# Altium PCB PCB2.PcbDoc (part 1 of 4)
Units mm, origin at the board's own origin, x right, y up, seen from the top; angles counter-clockwise.
Board outline 247 x 102 mm, 2 copper layers (Top Layer, Bottom Layer); 199 components, 195 nets, 863 pads, 110 vias.
Unrouted connection lines stored in the file: 60.
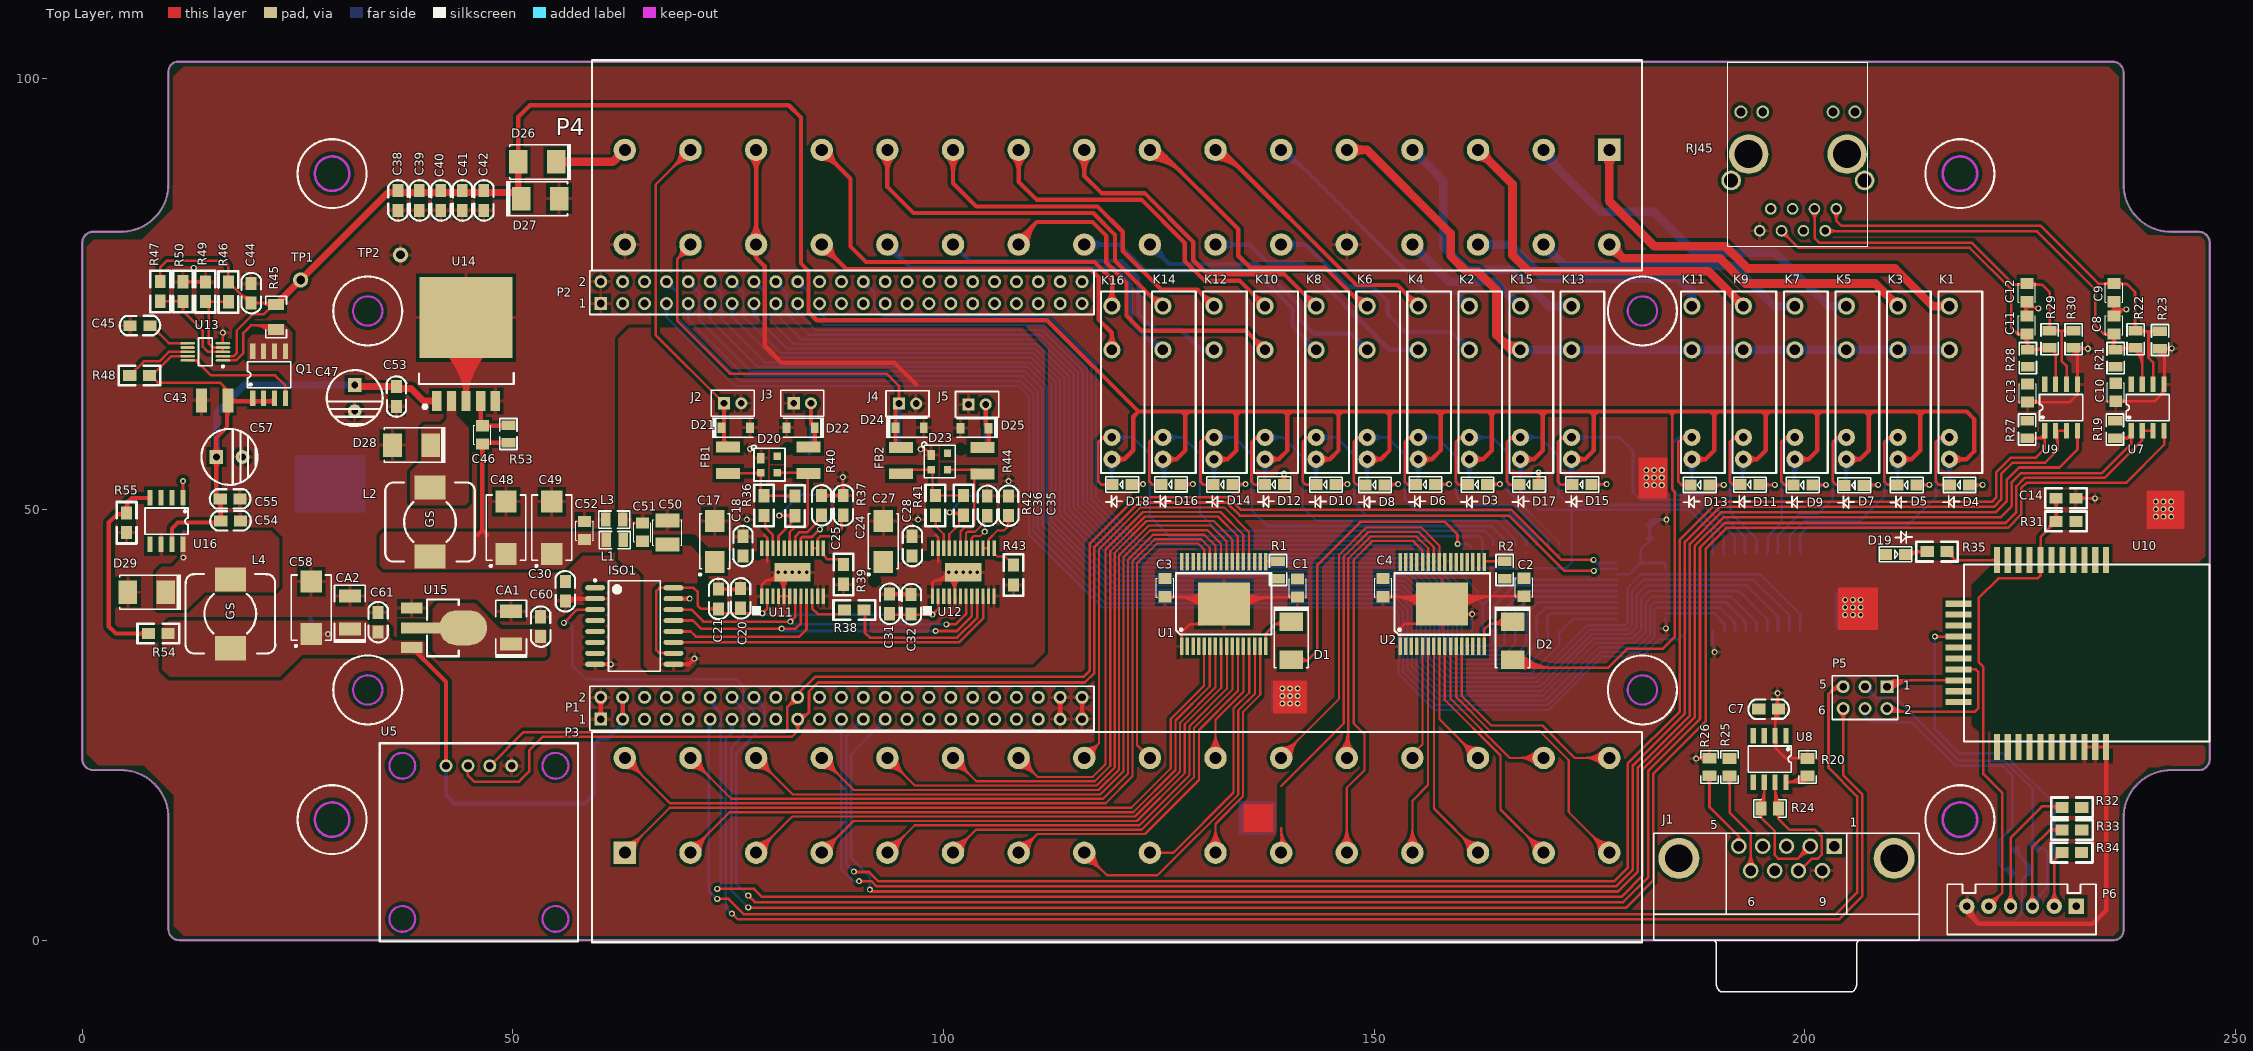
[diagram p0: Top Layer view]
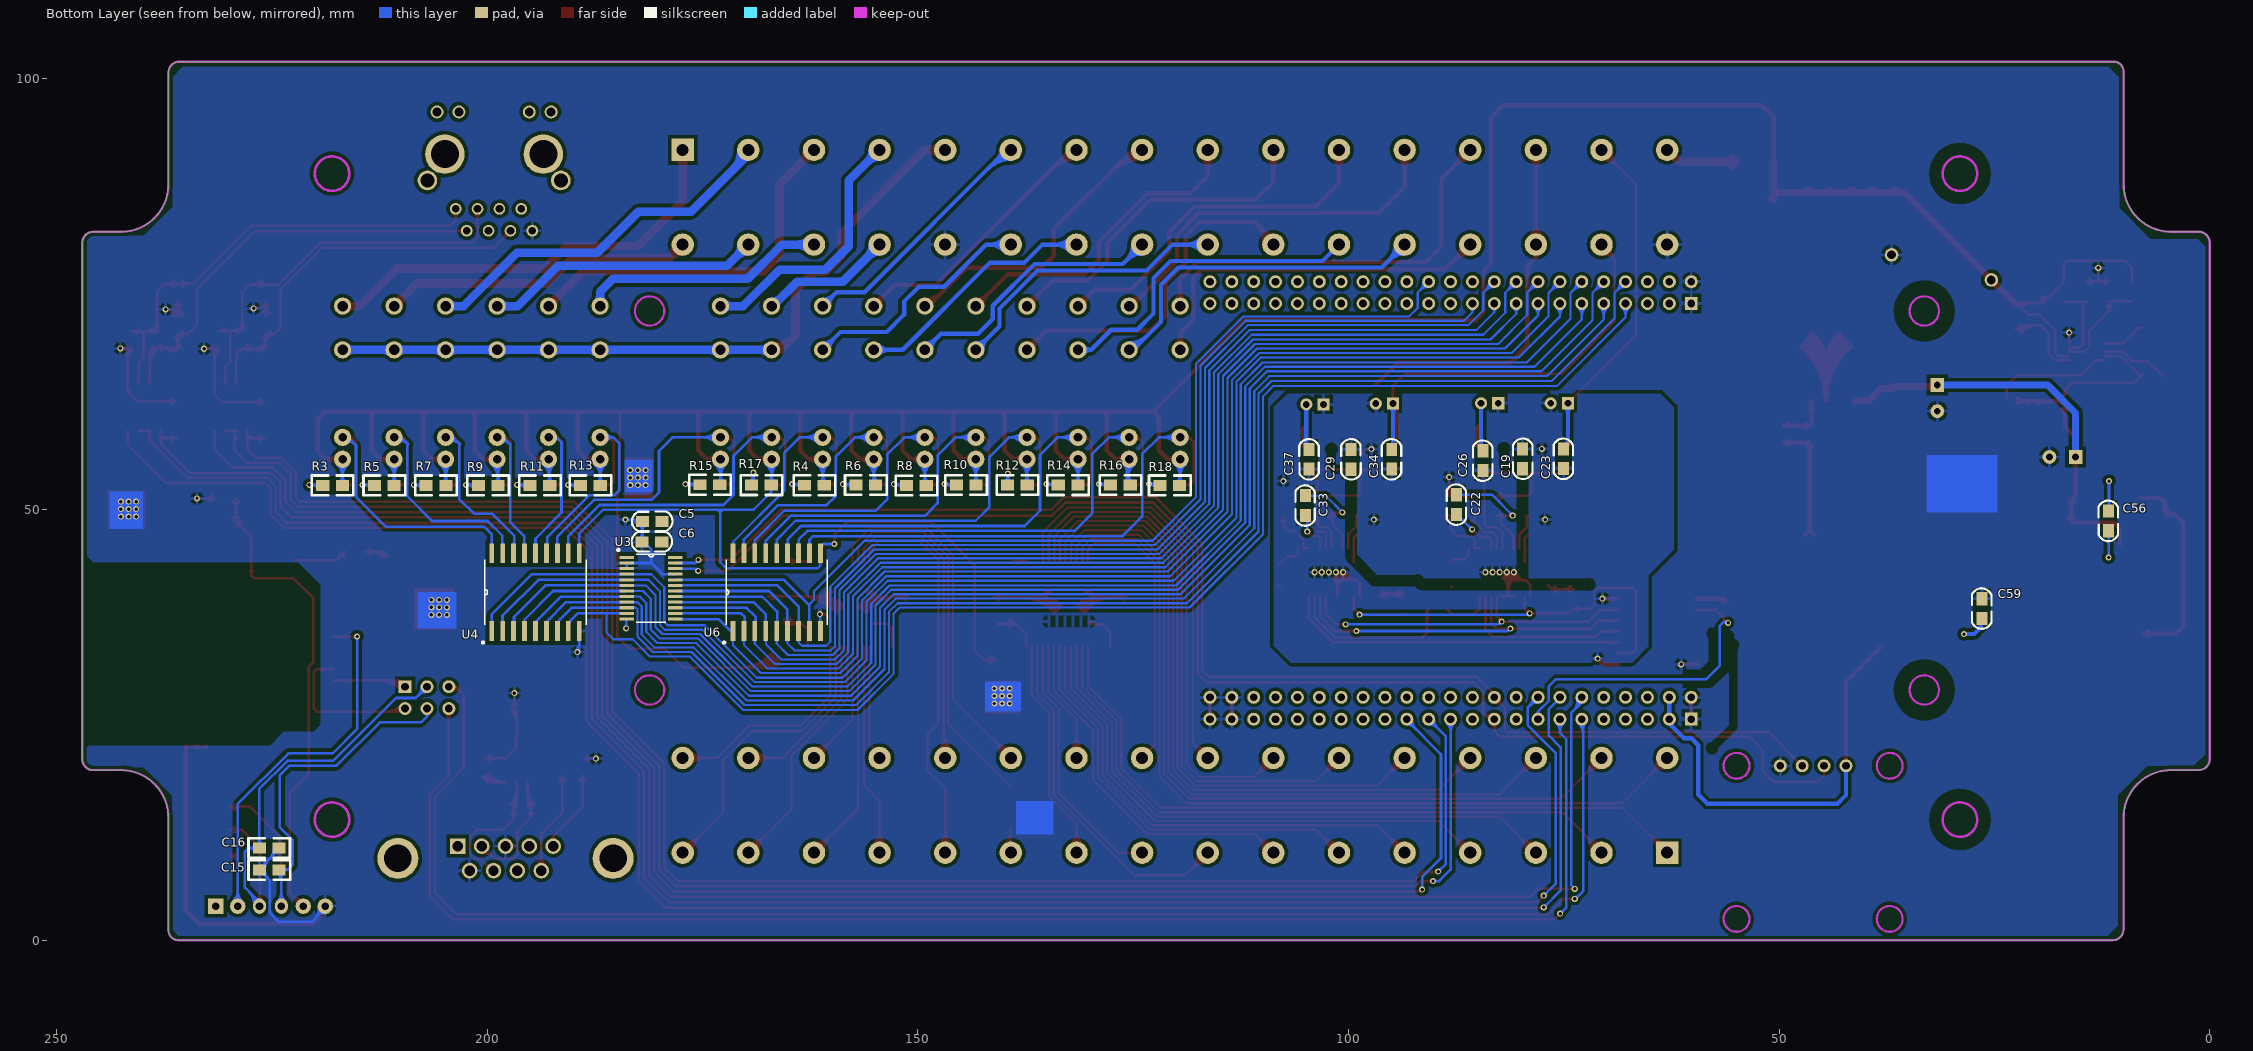
[diagram p1: Bottom Layer view, seen from below]

## Layer stack, top to bottom
Top Layer: signal copper 0.0356
Dielectric: dielectric 0.32, FR-4, Dk 4.8
Bottom Layer: signal copper 0.0356

## Board outline
1.27,19.75 4.5,19.75 cw(c4.5,14.25) 10,14.25 10,1.27 ccw(c11.27,1.27) 11.27,0 235.857,0 ccw(c235.857,1.143) 237,1.143 237,14.243 cw(c242.5,14.243) 242.5,19.743 245.73,19.743 ccw(c245.73,21.013) 247,21.013 247,80.98 ccw(c245.73,80.98) 245.73,82.25 242.5,82.25 cw(c242.5,87.75) 237,87.75 237,100.73 ccw(c235.73,100.73) 235.73,102 11.143,102 ccw(c11.143,100.857) 10,100.857 10,87.757 cw(c4.5,87.757) 4.5,82.257 1.27,82.257 ccw(c1.27,80.987) 0,80.987 0,21.02 ccw(c1.27,21.02)

## Design rules (kind name [scope] priority, off if disabled: settings)
Clearance [All] p1: gap=0.4
ComponentClearance [All] p1: gap=0.254 collisioncheckmode=3 verticalgap=0.254
PolygonConnect [All] p1: connectstyle=Relief reliefconductorwidth=0.4 reliefentries=4 polygonreliefangle="90 Angle"
RoutingVias [All] p1: holewidth=0.711 width=1.27 viastyle="Through Hole" minholewidth=0.711 minwidth=1.27 maxholewidth=0.711 maxwidth=1.27
SolderMaskExpansion [All] p1: expansion=0.102
TestPointUsage [All] p1: valid=0 allowmultiple=FALSE
Testpoint [All] p1: side=15 testpointundercomponent=TRUE minsize=1.016 maxsize=2.54 preferedsize=1.524 minholesize=0 maxholesize=1.016 preferedholesize=0.813 testpointgrid=0.025 style=1023 order=0123456789
Width [All] p1: maxlimit=2 minlimit=0.254 preferedwidth=0.254 toplayer_prefwidth=0.3 bottomlayer_prefwidth=0.3 minimp=50.000000 maximp=50.000000 favimp=50.000000
18 further rules are at their usual default settings.

## Classes and differential pairs
net class PA[0..7]: PA0 PA1 PA2 PA3 PA4 PA5 PA6 PA7
net class PB[0..7]: PB0 PB1 PB2 PB3 PB4 PB5 PB6 PB7
component class Designator7: C38 C39 C40 C41 C42 C43 C44 C45 C46 C47 C48 C49 C50 C51 C52 C53 C54 C55 C56 C57 C58 C59 C60 C61 CA1 CA2 D26 D27 D28 D29 L1 L2 L3 L4 Q1 R45 R46 R47 R48 R49 R50 R51 R52 R53 R54 R55 TP1 TP2 U13 U14 U15 U16
component class Designator1: P1 P2 P3 P4
component class Designator2: C1 C2 C3 C4 D1 D2 R1 R2 U1 U2
component class Designator4: C5 C6 D3 D4 D5 D6 D7 D8 D9 D10 D11 D12 D13 D14 D15 D16 D17 D18 K1 K2 K3 K4 K5 K6 K7 K8 K9 K10 K11 K12 K13 K14 K15 K16 R3 R4 R5 R6 R7 R8 R9 R10 R11 R12 R13 R14 R15 R16 R17 R18 U3 U4 U5 U6
component class Designator5: C7 C8 C9 C10 C11 C12 C13 C14 C15 C16 D19 J1 P5 P6 R19 R20 R21 R22 R23 R24 R25 R26 R27 R28 R29 R30 R31 R32 R33 R34 R35 RJ45 U7 U8 U9 U10
component class Designator6: C17 C18 C19 C20 C21 C22 C23 C24 C25 C26 C27 C28 C29 C30 C31 C32 C33 C34 C35 C36 C37 D20 D21 D22 D23 D24 D25 FB1 FB2 ISO1 J2 J3 J4 J5 R36 R37 R38 R39 R40 R41 R42 R43 R44 U11 U12

## Components (designator, comment, footprint, x,y, rotation, side; value= is the part's Value field where it differs from the comment)
C1 "Cap" C-0805 142.01,39.19 r90 top
C2 "0.1uF/10%/0805/50VDC" C-0805 168.28,39.28 r90 top
C3 "Cap" C-0805 126.6,39.23 r90 top
C4 "0.1uF/10%/0805/50VDC" C-0805 151.94,39.23 r90 top
C5 "Cap" 0805_cap 179.99,48.5 r0 bottom
C6 "Cap" 0805_cap 180.03,46.13 r0 bottom
C7 "" 0805_cap 194.95,26.95 r0 top
C8 "0.1uF/10%/0805/50VDC" C-0805 235,73.12 r270 top
C9 "0.1uF/10%/0805/50VDC" C-0805 236.8,73.48 r90 top
C10 "0.1uF/10%/0805/50VDC" C-0805 235.19,65.32 r270 top
C11 "0.1uF/10%/0805/50VDC" C-0805 224.87,73.12 r270 top
C12 "0.1uF/10%/0805/50VDC" C-0805 226.67,73.48 r90 top
C13 "0.1uF/10%/0805/50VDC" C-0805 224.96,65.22 r270 top
C14 "0.1uF" C0805 228.92,51.31 r180 top
C15 "101" C0805 223.89,8.17 r180 bottom
C16 "101" C0805 226.69,10.7 r0 bottom
C17 "293D475X9035C2TE3" 6032-28 73.43,46.3 r90 top
C18 "GRM188R71H104KA93D" 0805_cap 76.58,44.92 r90 top
C19 "GRM188R71H104KA93D" 0805_cap 79.883,55.05 r90 bottom
C20 "GRM188R71H104KA93D" 0805_cap 76.31,38.85 r90 top
C21 "GRM188R71H104KA93D" 0805_cap 73.75,38.78 r90 top
C22 "GRM1885C1H222JA01D" 0805_cap 87.33,51.41 r270 bottom
C23 "06035C104KAT2A" 0805_cap 74.91,56.73 r270 bottom
C24 "06035C104KAT2A" 0805_cap 88.24,49.65 r90 top
C25 "C1608X7R1H223K" 0805_cap 85.7,49.65 r90 top
C26 "06035C104KAT2A" 0805_cap 84.27,56.51 r270 bottom
C27 "293D475X9035C2TE3" 6032-28 93,46.3 r90 top
C28 "GRM188R71H104KA93D" 0805_cap 96.24,44.92 r90 top
C29 "GRM188R71H104KA93D" 0805_cap 99.833,54.99 r90 bottom
C30 "GRM188R71H104KA93D" 0805_cap 56.21,41.35 r270 top
C31 "GRM188R71H104KA93D" 0805_cap 93.61,38.21 r90 top
C32 "GRM188R71H104KA93D" 0805_cap 96.13,38.17 r90 top
C33 "GRM1885C1H222JA01D" 0805_cap 104.89,51.3 r270 bottom
C34 "06035C104KAT2A" 0805_cap 94.86,56.67 r270 bottom
C35 "06035C104KAT2A" 0805_cap 107.42,49.61 r90 top
C36 "C1608X7R1H223K" 0805_cap 104.96,49.59 r90 top
C37 "06035C104KAT2A" 0805_cap 104.44,56.67 r270 bottom
C38 "Cap" 0805_cap 36.52,85.05 r90 top
C39 "Cap" 0805_cap 39.015,85.05 r90 top
C40 "Cap" 0805_cap 41.51,85.05 r90 top
C41 "Cap" 0805_cap 44.005,85.05 r90 top
C42 "Cap" 0805_cap 46.5,85.05 r90 top
C43 "GRM32ER72A225KA35L" 1210 15.37,62.67 r0 top
C44 "06031C102JAT2A" 0805_cap 19.49,74.29 r90 top
C45 "UMK107ABJ474KA-T" 0805_cap 7.53,71.23 r180 top
C46 "0.1uF/50V" C-0805 45.55,60.37 r270 top
C47 "220μF" CZ3.0/6.5 31.63,62.94 r90 top
C48 "476C" 7343-43 49.21,47.89 r90 top
C49 "476C" 7343-43 54.501,47.89 r90 top
C50 "10uF/10%/1210/16VDC" C-1210 66.23,49.54 r270 top
C51 "0.1uF/10%/0805/50VDC" C-0805 64.12,49.08 r270 top
C52 "0.1UF" C-0805 57.4,49.26 r270 top
C53 "0.1uF" 0805_CAP 36.61,63.96 r270 top
C54 "4.7μF/10%/0805" 0805_CAP 18.05,48.56 r180 top
C55 "4.7μF/10%/0805" 0805_CAP 18,51.1 r180 top
C56 "0.01μF/10%/0805" 0805_CAP 11.64,49.52 r270 bottom
C57 "220μF" CZ3.0/6.5 17.09,56.11 r180 top
C58 "476C" 7343-43 26.58,38.6 r90 top
C59 "0.1μf/10%/0805" 0805_CAP 26.34,39.34 r270 bottom
C60 "0.1uF" 0805_CAP 53.09,35.57 r90 top
C61 "0.1uF" 0805_CAP 34.21,36.09 r90 top
CA1 "4.7UF/16V" 3528cap 49.82,34.4 r90 top
CA2 "10UF/16V" 3528cap 31.1,36.16 r90 top
D1 "SMB" SMB 140.37,34.78 r270 top
D2 "SMB" SMB 166.07,34.78 r270 top
D3 "LED3" 0805LED 161.95,52.9 r180 top
D4 "LED3" 0805LED 217.92,52.88 r180 top
D5 "LED3" 0805LED 211.79,52.86 r180 top
D6 "LED3" 0805LED 155.92,52.92 r180 top
D7 "LED3" 0805LED 205.69,52.83 r180 top
D8 "LED3" 0805LED 150.05,52.88 r180 top
D9 "LED3" 0805LED 199.72,52.85 r180 top
D10 "LED3" 0805LED 144.36,52.9 r180 top
D11 "LED3" 0805LED 193.59,52.9 r180 top
D12 "LED3" 0805LED 138.36,52.92 r180 top
D13 "LED3" 0805LED 187.76,52.88 r180 top
D14 "LED3" 0805LED 132.41,52.92 r180 top
D15 "LED3" 0805LED 174.1,52.92 r180 top
D16 "LED3" 0805LED 126.36,52.94 r180 top
D17 "LED3" 0805LED 167.94,52.92 r180 top
D18 "LED3" 0805LED 120.7,52.92 r180 top
D19 "VDD33" 0805LED 210.55,44.79 r0 top
D20 "" SOT-143 78.78,56.17 r0 top
D21 "CDSOD323-T15SC" SOD-123 75.87,59.5 r0 top
D22 "CDSOD323-T15SC" sod-123 83.4,59.5 r180 top
D23 "" SOT-143 98.56,56.53 r0 top
D24 "" sod-123 96.06,59.5 r0 top
D25 "" sod-123 103.59,59.45 r180 top
D26 "B540C-13-F" SMB 52.823,90.36 r180 top
D27 "SMCJ26CA" SMB 53.16,86.09 r0 top
D28 "D Schottky" SMB 38.23,57.48 r180 top
D29 "SMB" SMB 7.5,40.4 r180 top
FB1 "MH3261-501Y" 1210 74.98,55.73 r270 top
FB2 "MH3261-501Y" 1210 95.05,55.68 r270 top
ISO1 "ISO7641FCDW" M16B_N 64.09,36.48 r0 top
J1 "" CONN_1734348-1 197.866,0 r180 top
J2 "VOUT" PIN-S-2.0-1*2 74.51,62.34 r0 top
J3 "IOUT" PIN-S-2.0-1*2 82.6,62.34 r0 top
J4 "VOUT" PIN-S-2.0-1*2 94.82,62.29 r0 top
J5 "IOUT" PIN-S-2.0-1*2 102.89,62.21 r0 top
K1 "Relay-SPST" PA1a-24v 215.504,54.232 r90 top
K2 "Relay-SPST" PA1a-24v 159.769,54.232 r90 top
K3 "Relay-SPST" PA1a-24v 209.525,54.232 r90 top
K4 "Relay-SPST" PA1a-24v 153.84,54.232 r90 top
K5 "Relay-SPST" PA1a-24v 203.546,54.232 r90 top
K6 "Relay-SPST" PA1a-24v 147.91,54.232 r90 top
K7 "Relay-SPST" PA1a-24v 197.567,54.232 r90 top
K8 "Relay-SPST" PA1a-24v 141.981,54.232 r90 top
K9 "Relay-SPST" PA1a-24v 191.589,54.232 r90 top
K10 "Relay-SPST" PA1a-24v 136.051,54.232 r90 top
K11 "Relay-SPST" PA1a-24v 185.61,54.232 r90 top
K12 "Relay-SPST" PA1a-24v 130.122,54.232 r90 top
K13 "Relay-SPST" PA1a-24v 171.628,54.232 r90 top
K14 "Relay-SPST" PA1a-24v 124.192,54.232 r90 top
K15 "Relay-SPST" PA1a-24v 165.699,54.232 r90 top
K16 "Relay-SPST" PA1a-24v 118.263,54.232 r90 top
L1 "0R/5%/0805/1/8W" R-0805 60.31,45.56 r0 top
L2 "GSRH129-470M" GSDS104C2 40.37,48.55 r0 top
L3 "0R/5%/0805/1/8W" R-0805 60.27,47.93 r0 top
L4 "15μH" GSDS104C2 17.19,37.9 r0 top
P1 "Header 23X2" HDR2X23 60.198,25.658 r0 top locked
P2 "Header 23X2" HDR2X23 60.198,73.914 r0 top locked
P3 "Header 16X2" CON16X2-8.5 62.992,10.16 r90 top locked
P4 "Header 16X2" CON16X2-8.5 177.292,91.76 r270 top locked
P5 "Header 3X2" HDR2X3 209.52,29.43 r180 top
P6 "ISP" SIP-6B 231.5,3.95 r180 top
Q1 "FDS8870" SO-G8 21.7,65.65 r0 top
R1 "10K/1%/0805/1/8W" R-0805 139.74,41.48 r90 top
R2 "10K/1%/0805/1/8W" R-0805 166.05,41.48 r90 top
R3 "Res3" 0805 216.8,52.81 r0 bottom
R4 "Res3" 0805 160.86,52.82 r0 bottom
R5 "Res3" 0805 210.79,52.81 r0 bottom
R6 "Res3" 0805 154.89,52.86 r0 bottom
R7 "Res3" 0805 204.79,52.81 r0 bottom
R8 "Res3" 0805 151.3,52.79 r180 bottom
R9 "Res3" 0805 198.73,52.81 r0 bottom
R10 "Res3" 0805 145.52,52.84 r180 bottom
R11 "Res3" 0805 192.73,52.81 r0 bottom
R12 "Res3" 0805 139.58,52.84 r180 bottom
R13 "Res3" 0805 186.86,52.81 r0 bottom
R14 "Res3" 0805 133.69,52.83 r180 bottom
R15 "Res3" 0805 172.99,52.88 r0 bottom
R16 "Res3" 0805 127.61,52.84 r180 bottom
R17 "Res3" 0805 167.01,52.83 r0 bottom
R18 "Res3" 0805 121.88,52.81 r180 bottom
R19 "10K/1%/0805/1/8W" R-0805 236.89,57.8 r90 top
R20 "CRCW080560R4FKEA" 0805_HV 200.3,20.1 r90 top
R21 "47K/5%/0805/1/8W" R-0805 235.17,69.08 r270 top
R22 "12K/1%/0805/1/8W" R-0805 237.49,71.28 r270 top
R23 "47K/5%/0805/1/8W" R-0805 240.34,71.18 r270 top
R24 "CRCW080560R4FKEA" 0805_HV 195.93,15.28 r180 top
R25 "CRCW080560R4FKEA" 0805_HV 191.26,20.1 r90 top
R26 "CRCW080560R4FKEA" 0805_HV 188.91,20.11 r270 top
R27 "10K/1%/0805/1/8W" R-0805 226.71,57.8 r90 top
R28 "47K/5%/0805/1/8W" R-0805 224.98,69.08 r270 top
R29 "12K/1%/0805/1/8W" R-0805 227.51,71.28 r270 top
R30 "47K/5%/0805/1/8W" R-0805 230.3,71.28 r270 top
R31 "Res2" 0805 229.17,48.63 r0 top
R32 "3.3k" R0805 229.61,15.43 r180 top
R33 "3.3k" R0805 229.61,12.81 r180 top
R34 "Res2" R0805 232.38,10.17 r0 top
R35 "620Ω" R0805 213.95,45.11 r180 top
R36 "CRCW060315R0JNEA" 0805 79.15,49.31 r90 top
R37 "CRCW060315R0JNEA" 0805 82.75,49.28 r90 top
R38 "Res3" 0805 90.78,38.33 r180 top
R39 "RT0603BRD0715KL" 0805 88.38,41.32 r90 top
R40 "RPC2512JT15R0" 1210 84.3,55.73 r270 top
R41 "CRCW060315R0JNEA" 0805 99.04,49.34 r90 top
R42 "CRCW060315R0JNEA" 0805 102.31,49.34 r90 top
R43 "RT0603BRD0715KL" 0805 108.11,41.26 r90 top
R44 "RPC2512JT15R0" 1210 104.5,55.66 r270 top
R45 "PRL1632-R020-F-T1" 1206 22.5,72.35 r270 top
R46 "CRCW060395K3FKEA" 0805 16.96,74.13 r90 top
R47 "CRCW060347K5FKEA" 0805 9.05,74.18 r90 top
R48 "CRCW060310K0FKEA" 0805 7.79,65.56 r180 top
R49 "CRCW06037K50FKEA" 0805 14.28,76.44 r270 top
R50 "CRCW060315K8FKEA" 0805 11.68,76.45 r270 top
R53 "4.7K/1%/0805" R-0805 50.37,57.27 r90 top
R54 "10K" 0805 7.68,35.6 r0 top
R55 "3.24K/1%/0805" 0805 5.15,49.61 r270 top
RJ45 "HR911105A-RJ45" HR911105A 199.19,91.26 r0 top
TP1 "TP-040_RND" TP-040_RND 25.35,76.66 r0 top
TP2 "TP-040_RND" TP-040_RND 36.94,79.57 r0 top
U1 "MC33975" SOIC-32 137.41,34.13 r90 top
U2 "MC33975" SOIC-32 162.76,34.11 r90 top
U3 "PCA9555" PW24 180.95,40.87 r180 bottom
U4 "ULN2803A_DW_18" DW18 194.38,40.4 r90 bottom
U5 "MPU6050-MODULE" MPU6050-MODULE 34.544,22.86 r0 top
U6 "ULN2803A_DW_18" DW18 166.38,40.4 r90 bottom
U7 "MAX3485/SO-8" SO-G8 239.81,61.84 r0 top
U8 "SN65HVD230" SO-G8 195.9,21.03 r180 top
U9 "MAX3485/SO-8" SO-G8 229.76,61.84 r0 top
U10 "STM32W108-3" STM32W108-3 218.47,23.06 r0 top locked
U11 "DAC8760IPWP" PWP24-DIE84X166 82.45,42.72 r90 top
U12 "DAC8760IPWP" PWP24-DIE84X166 102.28,42.72 r90 top
U13 "LM5069MM-2/NOPB" MUB10A_N 14.28,68.31 r180 top
U14 "LM2596S-ADJ" TO-263(S)-5 44.58,71.21 r0 top
U15 "AS1117-3.3V" SOT-223 44.19,36.27 r270 top
U16 "TPS5430" SO-G8 9.77,48.65 r180 top

## Footprints (in the part's own frame and the unit in brackets; to place one, negate y for a bottom-side part, rotate by r counter-clockwise, add the part's x,y. Pads: shape width x height; smd on the part's side, far side on the other; paste and mask are expansions set on the pad)
0805 [mil]
  rect 60x50 smd: 1(0,0) 2(90,0)
  silkscreen extent -50,-45 140,45
0805_cap [mm]
  rect 1.524x1.27 smd: 1(-0.31,-0.11) 2(1.976,-0.11)
  silkscreen extent -1.51,-1.26 3.19,0.99
0805_CAP [mm]
  rect 1.524x1.27 smd: 1(-0.31,-0.11) 2(1.976,-0.11)
  silkscreen extent -1.51,-1.26 3.19,0.99
0805_HV [mil] "0805 with 30mil clearance between pads"
  rect 50x63 smd: 1(-40,0) 2(40,0)
  silkscreen extent -74,-40 74,40, body extent -43,-29 43,29, height 43
0805LED [mm]
  rect 1.4x1.27 smd: 1(-1.143,0.013) 2(1.067,0.013)
  silkscreen extent -1.94,-0.88 1.88,2.67
1206 [mm] "1206 from SM-752 data"
  rect 1.3x1.85 smd: 1(-1.45,0) 2(1.45,0)
  silkscreen extent -2.4,-1.21 2.4,1.21, body extent -1.7,-0.9 1.7,0.9, height 1.35
1210 [mil]
  rect 50x110 smd mask+2: 1(60,0) 2(-60,0)
3528cap [mil]
  rect 60x100 smd: 1(-1,1) 2(149,1)
  silkscreen extent -61,-69 199,71
6032-28 [mm] "Medium Density IPC based on Vishay Sprague 293D datasheet."
  rect 2.55x2.3 smd: 1(-2.375,0) 2(2.375,0)
  silkscreen extent -3.96,-1.75 3.2,1.82, body extent -3.15,-1.75 3.15,1.75, height 2.8
7343-43 [mm] "Medium density IPC based on Kemet T495 series"
  rect 2.55x2.45 smd: 1(-3.025,0) 2(3.025,0)
  silkscreen extent -4.56,-2.3 3.8,2.3, body extent -3.8,-2.3 3.8,2.3, height 4.3
C0805 [mil]
  rect 60x50 smd: 1(-100,0) 2(-10,0)
  silkscreen extent -150,-45 40,45
C-0805 [mm]
  rect 1.3x1.5 smd: 1(0.65,0.9) 2(2.75,0.9)
  silkscreen extent 0.6,-0.1 2.8,1.9
C-1210 [mm]
  rect 1.6x2.8 smd: 1(0.8,1.7) 2(3.6,1.7)
  silkscreen extent 0.7,0.03 3.7,3.37
CON16X2-8.5 [mm]
  rect 2.6x2.6 hole 1.4: 1(0,0)
  round 2.6 hole 1.4: 2(11,0) 3(0,-7.62) 4(11,-7.62) 5(0,-15.24) 6(11,-15.24) 7(0,-22.86) 8(11,-22.86) 9(0,-30.48) 10(11,-30.48) 11(0,-38.1) 12(11,-38.1) 13(0,-45.72) 14(11,-45.72) 15(0,-53.34) 16(11,-53.34) 17(0,-60.96) 18(11,-60.96) 19(0,-68.58) 20(11,-68.58) 21(0,-76.2) 22(11,-76.2) 23(0,-83.82) 24(11,-83.82) 25(0,-91.44) 26(11,-91.44) 27(0,-99.06) 28(11,-99.06) 29(0,-106.68) 30(11,-106.68) 31(0,-114.3) 32(11,-114.3)
  silkscreen extent -10.4,-118.11 14,3.81
CONN_1734348-1 [mm] "Connector; D Subminiature 9 Position; Right Angle"
  rect 1.8x1.8 hole 1.2: 1(-5.54,-10.92)
  round 1.8 hole 1.2: 2(-2.77,-10.92) 3(0,-10.92) 4(2.77,-10.92) 5(5.54,-10.92) 6(-4.155,-8.08) 7(-1.385,-8.08) 8(1.385,-8.08) 9(4.155,-8.08)
  round 4.76 hole 3.18: 10(-12.495,-9.5) 11(12.495,-9.5)
  silkscreen extent -15.4,-12.4 15.4,6, body extent -15.4,-12.4 15.4,6.02, height 12.52
CZ3.0/6.5 [mm]
  rect 1.6x1.6 hole 0.8: 1(1.524,0)
  round 1.6 hole 0.8: 2(-1.524,0)
  silkscreen extent -3.25,-3.25 3.25,3.25
DW18 [mil]
  rect 91x22 smd: 1(-178,200) 2(-178,150) 3(-178,100) 4(-178,50) 5(-178,0) 6(-178,-50) 7(-178,-100) 8(-178,-150) 9(-178,-200) 10(178,-200) 11(178,-150) 12(178,-100) 13(178,-50) 14(178,0) 15(178,50) 16(178,100) 17(178,150) 18(178,200)
  silkscreen extent -235,-232 150,245
GSDS104C2 [mm]
  rect 3.6x2.8 smd: 1(0,4) 2(0,-4)
  silkscreen extent -5.2,-4.6 5.21,4.6
HDR2X3 [mm] "Connector; Header; 3x2 Position"
  rect 1.5x1.5 hole 0.9: 1(0,0)
  round 1.5 hole 0.9: 2(0,2.54) 3(2.54,0) 4(2.54,2.54) 5(5.08,0) 6(5.08,2.54)
  silkscreen extent -1.27,-1.27 6.35,3.81
HDR2X23 [mm] "Connector; Header; 23x2 Position"
  rect 1.5x1.5 hole 0.9: 1(0,0)
  round 1.5 hole 0.9: 2(0,2.54) 3(2.54,0) 4(2.54,2.54) 5(5.08,0) 6(5.08,2.54) 7(7.62,0) 8(7.62,2.54) 9(10.16,0) 10(10.16,2.54) 11(12.7,0) 12(12.7,2.54) 13(15.24,0) 14(15.24,2.54) 15(17.78,0) 16(17.78,2.54) 17(20.32,0) 18(20.32,2.54) 19(22.86,0) 20(22.86,2.54) 21(25.4,0) 22(25.4,2.54) 23(27.94,0) 24(27.94,2.54) 25(30.48,0) 26(30.48,2.54) 27(33.02,0) 28(33.02,2.54) 29(35.56,0) 30(35.56,2.54) 31(38.1,0) 32(38.1,2.54) 33(40.64,0) 34(40.64,2.54) 35(43.18,0) 36(43.18,2.54) 37(45.72,0) 38(45.72,2.54) 39(48.26,0) 40(48.26,2.54) 41(50.8,0) 42(50.8,2.54) 43(53.34,0) 44(53.34,2.54) 45(55.88,0) 46(55.88,2.54)
  silkscreen extent -1.27,-1.27 57.28,3.81
HR911105A [mm]
  round 1.35 hole 0.89: 1(4.46,-6.35) 2(3.18,-8.89) 3(1.92,-6.35) 4(0.64,-8.89) 5(-0.62,-6.35) 6(-1.9,-8.89) 7(-3.16,-6.35) 8(-4.44,-8.89)
  round 1.5 hole 1.02: 9(6.625,4.9) 10(4.085,4.9) 11(-4.085,4.9) 12(-6.625,4.9)
  round 2.286 hole 1.63: ""(-7.745,-3.05) ""(7.745,-3.05)
  round 4.572 hole 3.25: ""(-5.715,0) ""(5.715,0)
  silkscreen extent -8.13,-10.67 8.13,10.67
M16B_N [mm] "SOIC, 16-Leads, Body 10.3x7.5mm, Pitch 1.27mm, IPC Medium Density"
  oval 2.3x0.6 smd: 1(-4.55,4.445) 2(-4.55,3.175) 3(-4.55,1.905) 4(-4.55,0.635) 5(-4.55,-0.635) 6(-4.55,-1.905) 7(-4.55,-3.175) 8(-4.55,-4.445) 9(4.55,-4.445) 10(4.55,-3.175) 11(4.55,-1.905) 12(4.55,-0.635) 13(4.55,0.635) 14(4.55,1.905) 15(4.55,3.175) 16(4.55,4.445)
  silkscreen extent -4.67,-5.25 3,5.42, body extent -3.75,-5.25 3.75,5.25, height 2.65
MPU6050-MODULE [mm]
  round 1.5 hole 0.9: 1(7.69,-2.61) 2(10.23,-2.61) 3(12.77,-2.61) 4(15.31,-2.61)
  Keep-Out Layer circle w0.254: c20.39,-20.39 r1.5
  Keep-Out Layer circle w0.254: c2.61,-20.39 r1.5
  Keep-Out Layer circle w0.254: c20.39,-2.61 r1.5
  Keep-Out Layer circle w0.254: c2.61,-2.61 r1.5
  silkscreen extent 0,-23 23,0
MUB10A_N [mm] "TSSOP, 10-Leads, Body 3x3mm, Pitch 0.5mm, IPC Medium Density"
  oval 1.7x0.3 smd: 1(-2.05,1) 2(-2.05,0.5) 3(-2.05,0) 4(-2.05,-0.5) 5(-2.05,-1) 6(2.05,-1) 7(2.05,-0.5) 8(2.05,0) 9(2.05,0.5) 10(2.05,1)
  silkscreen extent -2.17,-1.6 0.8,1.82, body extent -1.6,-1.6 1.6,1.6, height 1.09
PA1a-24v [mm]
  round 2 hole 1.2: 1(19.39,-1.27) 2(14.31,-1.27)
  round 2 hole 1: 3(4.15,-1.27) 4(1.61,-1.27)
  silkscreen extent 0,-5.08 21.08,0
PIN-S-2.0-1*2 [mm]
  rect 1.4x1.4 hole 0.8: 1(0,0)
  round 1.4 hole 0.8: 2(2,0)
  silkscreen extent -1.5,-1.5 3.5,1.5
PW24 [mil]
  rect 66x14 smd: 1(-111,140.75) 2(-111,115.16) 3(-111,89.57) 4(-111,63.98) 5(-111,38.39) 6(-111,12.8) 7(-111,-12.8) 8(-111,-38.39) 9(-111,-63.98) 10(-111,-89.57) 11(-111,-115.16) 12(-111,-140.75) 13(111,-140.75) 14(111,-115.16) 15(111,-89.57) 16(111,-63.98) 17(111,-38.39) 18(111,-12.8) 19(111,12.8) 20(111,38.39) 21(111,63.98) 22(111,89.57) 23(111,115.16) 24(111,140.75)
  silkscreen extent -155,-156 67,180
PWP24-DIE84X166 [mil]
  rect 70x15 smd: 1(-109.3,140.5) 2(-109.3,114.9) 3(-109.3,89.3) 4(-109.3,63.7) 5(-109.3,38.1) 6(-109.3,12.5) 7(-109.3,-13.1) 8(-109.3,-38.7) 9(-109.3,-64.3) 10(-109.3,-89.9) 11(-109.3,-115.5) 12(-109.3,-141.1) 13(109.7,-141.2) 14(109.7,-115.6) 15(109.7,-90) 16(109.7,-64.4) 17(109.7,-38.8) 18(109.7,-13.2) 19(109.7,12.4) 20(109.7,38) 21(109.7,63.6) 22(109.7,89.2) 23(109.7,114.8) 24(109.7,140.5)
  rect 84x166 smd: 25(0,-0.1)
  silkscreen extent -196,144 -156,184
R0805 [mil]
  rect 60x50 smd: 1(-100,0) 2(-10,0)
  silkscreen extent -150,-45 40,45
R-0805 [mm]
  rect 1.1x1.6 smd: 1(0.5,0.9) 2(2.5,0.9)
  silkscreen extent -0.3,-0.1 3.3,1.9
SIP-6B [mil]
  rect 70x70 hole 35: 1(0,0)
  round 70 hole 35: 2(100,0) 5(400,0) 6(500,0)
  oval 59.06x70 hole 35: 3(200,0) 4(300,0)
  silkscreen extent -90,-100 590,130
SMB [mm] "Molded Diode, 2-Leads, Body 5.4x3.6mm, IPC Medium Density, based on OnSemi component dimensions"
  rect 2.159x2.743 smd: 1(-2.21,0) 2(2.21,0)
  silkscreen extent -3.94,-2.08 3.18,2.08, body extent -2.7,-1.8 2.7,1.8, height 2.32
SO-G8 [mm]
  rect 0.6x1.8 smd: 1(-1.916,-2.7) 2(-0.646,-2.7) 3(0.624,-2.7) 4(1.894,-2.7) 5(1.894,2.7) 6(0.624,2.7) 7(-0.646,2.7) 8(-1.916,2.7)
  silkscreen extent -2.51,-1.52 2.49,1.52
SOD-123 [mm] "On Semi recommended land pattern"
  rect 0.915x1.22 smd: 1(-1.637,0) 2(1.637,0)
  silkscreen extent -2.74,-1.17 2.03,1.17, body extent -1.93,-0.9 1.93,0.9, height 1.35
sod-123 [mm] "On Semi recommended land pattern"
  rect 0.915x1.22 smd: 1(-1.637,0) 2(1.637,0)
  silkscreen extent -2.74,-1.17 2.03,1.17, body extent -1.93,-0.9 1.93,0.9, height 1.35
SOIC-32 [mm]
  rect 5x6.05 smd mask+0.08: 0(4.9,4.875)
  rect 2.05x0.4 smd mask+0.08: 1(0,9.75) 2(0,9.1) 3(0,8.45) 4(0,7.8) 5(0,7.15) 6(0,6.5) 7(0,5.85) 8(0,5.2) 9(0,4.55) 10(0,3.9) 11(0,3.25) 12(0,2.6) 13(0,1.95) 14(0,1.3) 15(0,0.65) 16(0,0) 17(9.8,0) 18(9.8,0.65) 19(9.8,1.3) 20(9.8,1.95) 21(9.8,2.6) 22(9.8,3.25) 23(9.8,3.9) 24(9.8,4.55) 25(9.8,5.2) 26(9.8,5.85) 27(9.8,6.5) 28(9.8,7.15) 29(9.8,7.8) 30(9.8,8.45) 31(9.8,9.1) 32(9.8,9.75)
  silkscreen extent 1.35,-0.67 8.48,10.43
SOT-143 [mm]
  rect 0.85x1.2 smd: 1(0,-0.2)
  rect 0.85x0.85 smd: 2(0,-1.9) 3(1.9,-1.9) 4(1.9,0)
  silkscreen extent -1.1,-2.85 2.8,1.3, body extent -0.26,-2.41 2.16,0.51, height 1
SOT-223 [mil]
  rect 50x100 smd: 1(-90.5,-234) 3(90.5,-234)
  oval 160x220 smd: 2(0,1)
  rect 50x200 smd: 2(0,-184)
  silkscreen extent -130,-164 130,-19
STM32W108-3 [mm]
  rect 0.7x3 smd: 1(16.51,21.074) 2(15.24,21.074) 3(13.97,21.074) 4(12.7,21.074) 5(11.43,21.074) 6(10.16,21.074) 7(8.89,21.074) 8(7.62,21.074) 9(6.35,21.074) 10(5.08,21.074) 11(3.81,21.074) 22(3.81,-0.627) 23(5.08,-0.627) 24(6.35,-0.627) 25(7.62,-0.627) 26(8.89,-0.627) 27(10.16,-0.627) 28(11.43,-0.627) 29(12.7,-0.627) 30(13.97,-0.627) 31(15.24,-0.627) 32(16.51,-0.627)
  rect 3x0.7 smd: 12(-0.627,16.002) 13(-0.627,14.732) 14(-0.627,13.462) 15(-0.627,12.192) 16(-0.627,10.922) 17(-0.627,9.652) 18(-0.627,8.382) 19(-0.627,7.112) 20(-0.627,5.842) 21(-0.627,4.572)
  silkscreen extent 0,0 28.5,20.57
TO-263(S)-5 [mm]
  rect 10.8x9.4 smd: 0(-0.025,1.075)
  rect 1.07x2.3 smd: 1(-3.425,-8.611) 2(-1.725,-8.611) 3(-0.025,-8.611) 4(1.675,-8.611) 5(3.375,-8.611)
  silkscreen extent -5.49,-9.47 5.51,-5.36
TP-040_RND [mil]
  round 70 / inner round 62 / far side round 62 hole 40: 1(0,0)

## Part data
C1 C3 C5 C6 C38 C39 C40 C41 C42: "Capacitor"
C2 C4 C8 C9 C10 C11 C12 C13 C50 C51: library part ASC-0024CA
C7: library part C1005X7R1C103K, "CAP, CERM, 0.01uF, 16V, +/-10%, X7R, 0402"
C14 C15 C16 C46 C52 C54 C55 C56 C59: library part Cap, "Capacitor"
C17 C27: "CAP, TA, 4.7uF, 35V, +/-10%, 1.9 ohm, SMD"
C18 C19 C20 C21 C23 C24 C26 C28 C29 C30 C31 C32 C34 C35 C37: "CAP, CERM, 0.1uF, 50V, +/-10%, X7R, 0603"
C22 C33: "CAP, CERM, 2200pF, 50V, +/-5%, C0G/NP0, 0603"
C25 C36: "CAP, CERM, 0.022uF, 50V, +/-10%, X7R, 0603"
C43: "CAP, CERM, 2.2uF, 100V, +/-10%, X7R, 1210"
C44: "CAP, CERM, 1000pF, 100V, +/-5%, X7R, 0603"
C45: "CAP, CERM, 0.47uF, 50V, 10%, X5R, 0603"
C47 C48 C49 C57 C58: library part "Cap Pol1", "Polarized Capacitor (Radial)"
C53 C60 C61: library part C
CA1 CA2: library part ECAP
D1 D2 D29: library part "Diode 1N5408", "3 Amp Medium Power Silicon Rectifier Diode"
D3 D4 D5 D6 D7 D8 D9 D10 D11 D12 D13 D14 D15 D16 D17 D18: "Typical BLUE SiC LED"
D19: library part LED3, "Typical BLUE SiC LED"
D20 D23: library part CD143A-SR70, "IC TVS ARRAY 2-LINE 70V SOT-143"
D21 D22 D24 D25: library part SMAJ15CA, "DIODE TVS ARRAY 15V SOD323"
D26 D27: library part "D Schottky", "Schottky Diode"
FB1 FB2: library part Ferrite_Bead, "BEAD FERRITE 500 OHM 3.0A 3216"
ISO1: library part ISO7241, "ISOLATOR DGTL 25MBPS 4CH 16SOIC"
J1: library part 1734348-1, "Conn D-SUB RCPT R/A 9POS GOLD/FL, TH"
J2 J3 J4 J5: library part 1727010, "TERMINAL BLOCK 3.5MM 2POS PCB"
K1 K2 K3 K4 K5 K6 K7 K8 K9 K10 K11 K12 K13 K14 K15 K16: "Single-Pole Single-Throw Relay"
L1 L3: library part ASR-0010AA
L2 L4: library part Inductor, "Inductor"
P1 P2: "Header, 23-Pin, Dual row"
P3 P4: "Header, 16-Pin, Dual row"
P5: "Header, 3-Pin, Dual row"
P6: library part "Header 6", "Header, 6-Pin"
Q1: library part MOSFET_N_8
R1 R2 R19 R27: library part ASR-0030AA
R3 R4 R5 R6 R7 R8 R9 R10 R11 R12 R13 R14 R15 R16 R17 R18 R31 R34 R38: "Resistor"
R20 R24 R25 R26: "RES, 60.4 ohm, 1%, 0.125W, 0805"
R21 R23 R28 R30: library part ASR-0134BA
R22 R29: library part ASR-0028BA
R32 R33: library part Res3, "Resistor"
R35: library part RES, "R"
R36 R37 R41 R42: "RES, 15 ohm, 5%, 0.1W, 0603"
R39 R43: "RES, 15.0k ohm, 0.1%, 0.1W, 0603"
R40 R44: library part CRA2512-FZ-R080ELF, "RES 15 OHM 1W 5% 2512"
R45: "RES, 0.02 ohm, 1%, 1W, 1206"
R46: "RES, 95.3k ohm, 1%, 0.1W, 0603"
R47: "RES, 47.5k ohm, 1%, 0.1W, 0603"
R48: "RES, 10.0k ohm, 1%, 0.1W, 0603"
R49: "RES, 7.50k ohm, 1%, 0.1W, 0603"
R50: "RES, 15.8k ohm, 1%, 0.1W, 0603"
R53 R54 R55: library part Res2, "Resistor"
TP1 TP2: "Test Point, O.040 Hole"
U3: library part PCF8575_PW_24, "Imported"
U4 U6: "Imported"
U7 U9: library part MAX485
U11 U12: library part DAC8760IPWP_1, "1-Channel, 16-Bit, Programmable Current/Voltage Output DAC for 4-20mA Current Loop Applications"
U13: "Positive High Voltage Hot Swap / Inrush Current Controller with Power Limiting, 10-pin MSOP, Pb-Free"
U14: library part SWITCHING
U15: library part AS1117

## Via types
v1: diameter 0.7, hole 0.4, Top Layer to Bottom Layer, 110 vias

## Nets (pads, with @x,y where several pads share a name; then routed paths per layer and width w, separated by ;. In a path a pad name is that pad's centre, name@x,y a point inside that pad or via, vN(x,y) a via of type N, cw(c..) or ccw(c..) an arc to the next point about the centre after c; other vN are vias at no path point)
+15V: C46.2 C48.1 C49.1 C52.2 L1.1 L2.2 R53.1 | length 17.3
  Top Layer w0.5: 45.9,47.06 46.45,47.61 ; C46.2@46.167,57.337 cw(c45.484,56.654) 46.45,56.654 cw(c47.416,56.654) C46.2@46.733,57.337 ; 47,47.06 46.45,47.61 ; R53.1@49.008,57.558 ccw(c48.496,57.046) 48.496,57.77 ccw(c48.496,58.494) R53.1@49.008,57.982 ; R53.1@49.47,57.77 46.58,57.77 46.45,57.64 46.45,47.61
+15V_ISO: C17.1 C18.1 C19.1 C27.1 C28.1 C29.1 C50.2 C51.2 D20.4 D23.4 L1.2 U11.24 U12.24
+24VDC_LIMIT: C43.1 C47.1 C53.1 C54.2 C55.2 C57.1 Q1.1 Q1.2 Q1.3 R48.1 U13.9 U14.1 U16.7 | length 96
  Top Layer w0.3: R48.1@7.79,65.56 8.11,65.56 10.36,67.81 U13.9@12.23,67.81 ; R48.1@8.23,65.29 8.79,64.73 16,64.73 16.894,63.836 C43.1@16.894,62.67 ; 16.303,64.427 cw(c15.324,63.447) C43.1@16.709,63.434
  Top Layer w0.5: U16.7@10.416,45.95 10.416,47.806 11.1,48.49 15.894,48.49 C54.2@16.074,48.67 16.074,51.16 15.566,51.668 15.566,58.356 16.81,59.6 16.81,61.24 ; C57.1@15.177,55.721 cw(c14.238,54.782) 15.566,54.782 cw(c16.894,54.782) C57.1@15.955,55.721 ; C57.1@15.177,56.499 ccw(c14.238,57.438) 15.566,57.438 ccw(c16.894,57.438) C57.1@15.955,56.499 ; C55.2@15.752,50.938 cw(c14.974,50.16) 16.074,50.16 ; C54.2@15.802,48.942 ccw(c15.145,49.599) 16.074,49.599 ccw(c17.003,49.599) C54.2@16.346,48.942 ; 16.074,50.401 cw(c16.833,50.401) C55.2@16.296,50.938 ; C43.1@16.622,61.636 cw(c16.167,61.181) 16.81,61.181 ; C43.1@16.637,61.621 cw(c16.292,61.235) 16.81,61.235 cw(c17.143,61.235) C43.1@17.027,61.547 ; 16.81,60.776 cw(c18.026,60.776) C43.1@17.166,61.636 ; C43.1@16.81,61.82 C43.1@16.81,62.586 ; C43.1@16.894,62.67 C43.1@16.81,62.586 ; C43.1@17.166,62.398 cw(c17.621,61.943) 17.621,62.586 ; C43.1@17.166,62.942 ccw(c18.026,63.802) 18.026,62.586 ; 19.093,62.586 cw(c19.093,61.66) Q1.1@19.748,62.315 ; Q1.1@19.819,62.315 cw(c20.474,61.66) 20.474,62.586 ; 20.363,62.586 cw(c20.363,61.66) Q1.2@21.018,62.315 ; Q1.2@21.089,62.315 cw(c21.744,61.66) 21.744,62.586 ; 21.633,62.586 cw(c21.633,61.66) Q1.3@22.288,62.315 ; Q1.3@22.275,62.338 ccw(c21.96,62.261) 21.96,62.586 ; Q1.3@22.324,62.95 21.96,62.586 ; C43.1@16.81,62.586 21.96,62.586
  Top Layer w0.8: C47.1@31.63,64.464 31.824,64.27 C53.1@36.5,64.27 36.7,64.07 38.16,64.07 39.631,62.599 U14.1@41.155,62.599 ; C53.1@36.666,64.309 ccw(c37.244,64.887) 37.244,64.07
  Bottom Layer w0.8: C57.1@15.283,56.393 ccw(c14.6,57.076) 15.566,57.076 ccw(c16.532,57.076) C57.1@15.849,56.393 ; C57.1@15.566,56.11 15.566,61.226 18.804,64.464 C47.1@31.63,64.464 ; C47.1@31.347,64.181 ccw(c30.664,63.498) 30.664,64.464 ccw(c30.664,65.43) C47.1@31.347,64.747
/RESET1: C14.2 P6.5 R31.1 U10.7 | length 67.6
  Top Layer w0.3: P6.5@221.34,3.95 222.89,5.5 222.89,17.14 220.73,19.3 220.73,31.73 220.17,32.29 220.17,39.71 222.47,42.01 227.03,42.01 227.36,42.34 227.36,46.82 R31.1@229.17,48.63 229.17,51.306 C14.2@229.174,51.31 ; P6.5@221.34,4.389 ccw(c221.34,5.449) 222.089,4.699 ccw(c222.839,3.95) P6.5@221.779,3.95 ; P6.5@221.34,4.689 ccw(c221.34,6.473) 222.602,5.212 ccw(c223.863,3.95) P6.5@222.079,3.95 ; U10.7@227.219,42.843 cw(c226.877,42.501) 227.36,42.501 cw(c227.843,42.501) U10.7@227.501,42.843 ; U10.7@227.219,45.425 ccw(c226.877,45.767) 227.36,45.767 ccw(c227.843,45.767) U10.7@227.501,45.425 ; 228.125,47.585 ccw(c227.081,48.63) R31.1@228.558,48.63 ; 228.432,47.892 cw(c229.043,47.281) R31.1@229.043,48.145 ; R31.1@228.637,48.097 ccw(c228.105,48.63) R31.1@228.858,48.63 ; R31.1@228.827,48.973 ccw(c227.999,49.801) 229.17,49.801 ccw(c230.341,49.801) R31.1@229.513,48.973 ; C14.2@228.831,50.967 cw(c228.013,50.149) 229.17,50.149 ; 229.17,50.129 cw(c230.355,50.129) C14.2@229.517,50.967
\C\S_AO: ISO1.14 U11.7 U12.7 | length 42.6
  Top Layer w0.3: ISO1.14@68.64,38.385 70.705,38.385 72.1,36.99 v1(82.2,36.99) 82.783,37.573 U11.7@82.783,39.944 ; ISO1.14@69.596,38.279 cw(c69.852,38.023) 69.852,38.385 cw(c69.852,38.747) ISO1.14@69.596,38.491 ; v1@82.2,37.19 ccw(c82.2,37.673) 82.541,37.331 ccw(c82.883,36.99) v1@82.4,36.99 ; v1(100.32,36.66) 101.39,36.66 102.613,37.883 U12.7@102.613,39.944
  Bottom Layer w0.3: v1@82.16,37.04 82.5,36.7 100.28,36.7 v1(100.32,36.66) ; 99.741,36.7 cw(c99.741,36.081) v1@100.179,36.519 ; 99.934,36.7 ccw(c99.934,37.046) v1@100.179,36.801
BOOT1: P6.2 R34.1 U10.15 | length 62.1
  Top Layer w0.3: v1(215.09,35.26) 215.098,35.252 U10.15@217.843,35.252 ; v1@215.231,35.119 cw(c215.554,34.796) 215.554,35.252 ; v1@215.231,35.401 ccw(c215.592,35.762) 215.592,35.252 ; U10.15@216.552,35.111 ccw(c216.21,34.769) 216.21,35.252 ccw(c216.21,35.735) U10.15@216.552,35.393 ; P6.2@228.437,4.473 ccw(c227.176,5.734) 228.96,5.734 ccw(c230.744,5.734) P6.2@229.483,4.473 ; P6.2@228.65,4.26 ccw(c227.9,5.01) 228.96,5.01 ccw(c230.02,5.01) P6.2@229.27,4.26 ; P6.2@228.96,3.95 228.96,9.29 R34.1@229.84,10.17 ; 229.024,9.354 ccw(c228.466,9.911) R34.1@229.238,10.071 ; 229.102,9.432 cw(c229.713,8.821) R34.1@229.713,9.685
  Bottom Layer w0.3: v1@214.949,35.119 cw(c214.607,34.777) 215.09,34.777 cw(c215.573,34.777) v1@215.231,35.119 ; v1(215.09,35.26) 215.09,24.53 217.92,21.7 223.08,21.7 228.96,15.82 P6.2@228.96,3.95 ; P6.2@228.437,4.473 ccw(c227.176,5.734) 228.96,5.734 ccw(c230.744,5.734) P6.2@229.483,4.473 ; P6.2@228.65,4.26 ccw(c227.9,5.01) 228.96,5.01 ccw(c230.02,5.01) P6.2@229.27,4.26
CANRX: P1.26 U8.4
CANTX: P1.24 U8.1
COM1: K1.2 K3.2 K5.2 K7.2 K9.2 K11.2 K13.2 K15.2 P4.9 | length 116.1
  Top Layer w1: P4.9@146.812,91.76 149.15,91.76 158.86,82.05 158.86,79.45 160.69,77.62 162.03,77.62 164.2,75.45 164.2,70.26 165.918,68.542 K15.2@166.969,68.542 ; P4.9@147.378,91.194 cw(c148.743,89.829) 148.743,91.76 cw(c148.743,93.691) P4.9@147.378,92.326 ; 164.725,69.735 ccw(c166.49,71.5) K15.2@166.889,69.036
  Bottom Layer w1: K15.2@166.969,68.542 K1.2@216.774,68.542 ; K15.2@167.322,68.188 cw(c168.176,67.335) 168.176,68.542 cw(c168.176,69.749) K15.2@167.322,68.896 ; K13.2@172.544,68.188 ccw(c171.691,67.335) 171.691,68.542 ccw(c171.691,69.749) K13.2@172.544,68.896 ; K13.2@173.252,68.188 cw(c174.105,67.335) 174.105,68.542 cw(c174.105,69.749) K13.2@173.252,68.896 ; K11.2@186.526,68.188 ccw(c185.673,67.335) 185.673,68.542 ccw(c185.673,69.749) K11.2@186.526,68.896 ; K11.2@187.233,68.188 cw(c188.087,67.335) 188.087,68.542 cw(c188.087,69.749) K11.2@187.233,68.896 ; K9.2@192.505,68.188 ccw(c191.651,67.335) 191.651,68.542 ccw(c191.651,69.749) K9.2@192.505,68.896 ; K9.2@193.212,68.188 cw(c194.066,67.335) 194.066,68.542 cw(c194.066,69.749) K9.2@193.212,68.896 ; K7.2@198.484,68.188 ccw(c197.63,67.335) 197.63,68.542 ccw(c197.63,69.749) K7.2@198.484,68.896 ; K7.2@199.191,68.188 cw(c200.044,67.335) 200.044,68.542 cw(c200.044,69.749) K7.2@199.191,68.896 ; K5.2@204.463,68.188 ccw(c203.609,67.335) 203.609,68.542 ccw(c203.609,69.749) K5.2@204.463,68.896 ; K5.2@205.17,68.188 cw(c206.023,67.335) 206.023,68.542 cw(c206.023,69.749) K5.2@205.17,68.896 ; K3.2@210.442,68.188 ccw(c209.588,67.335) 209.588,68.542 ccw(c209.588,69.749) K3.2@210.442,68.896 ; K3.2@211.149,68.188 cw(c212.002,67.335) 212.002,68.542 cw(c212.002,69.749) K3.2@211.149,68.896 ; K1.2@216.42,68.188 ccw(c215.567,67.335) 215.567,68.542 ccw(c215.567,69.749) K1.2@216.42,68.896